# Altium PCB KATADC_V1-3.PcbDoc (part 4 of 7)
Units mm, origin at the board's own origin, x right, y up, seen from the top; angles counter-clockwise.
Board outline 127 x 85.85 mm, 6 copper layers (Top Layer, InnerPlane1, InnerPlane2, InnerPlane3, InnerPlane4, Bottom Layer), stack 1.255 mm thick; 189 components, 188 nets, 905 pads, 1090 vias.
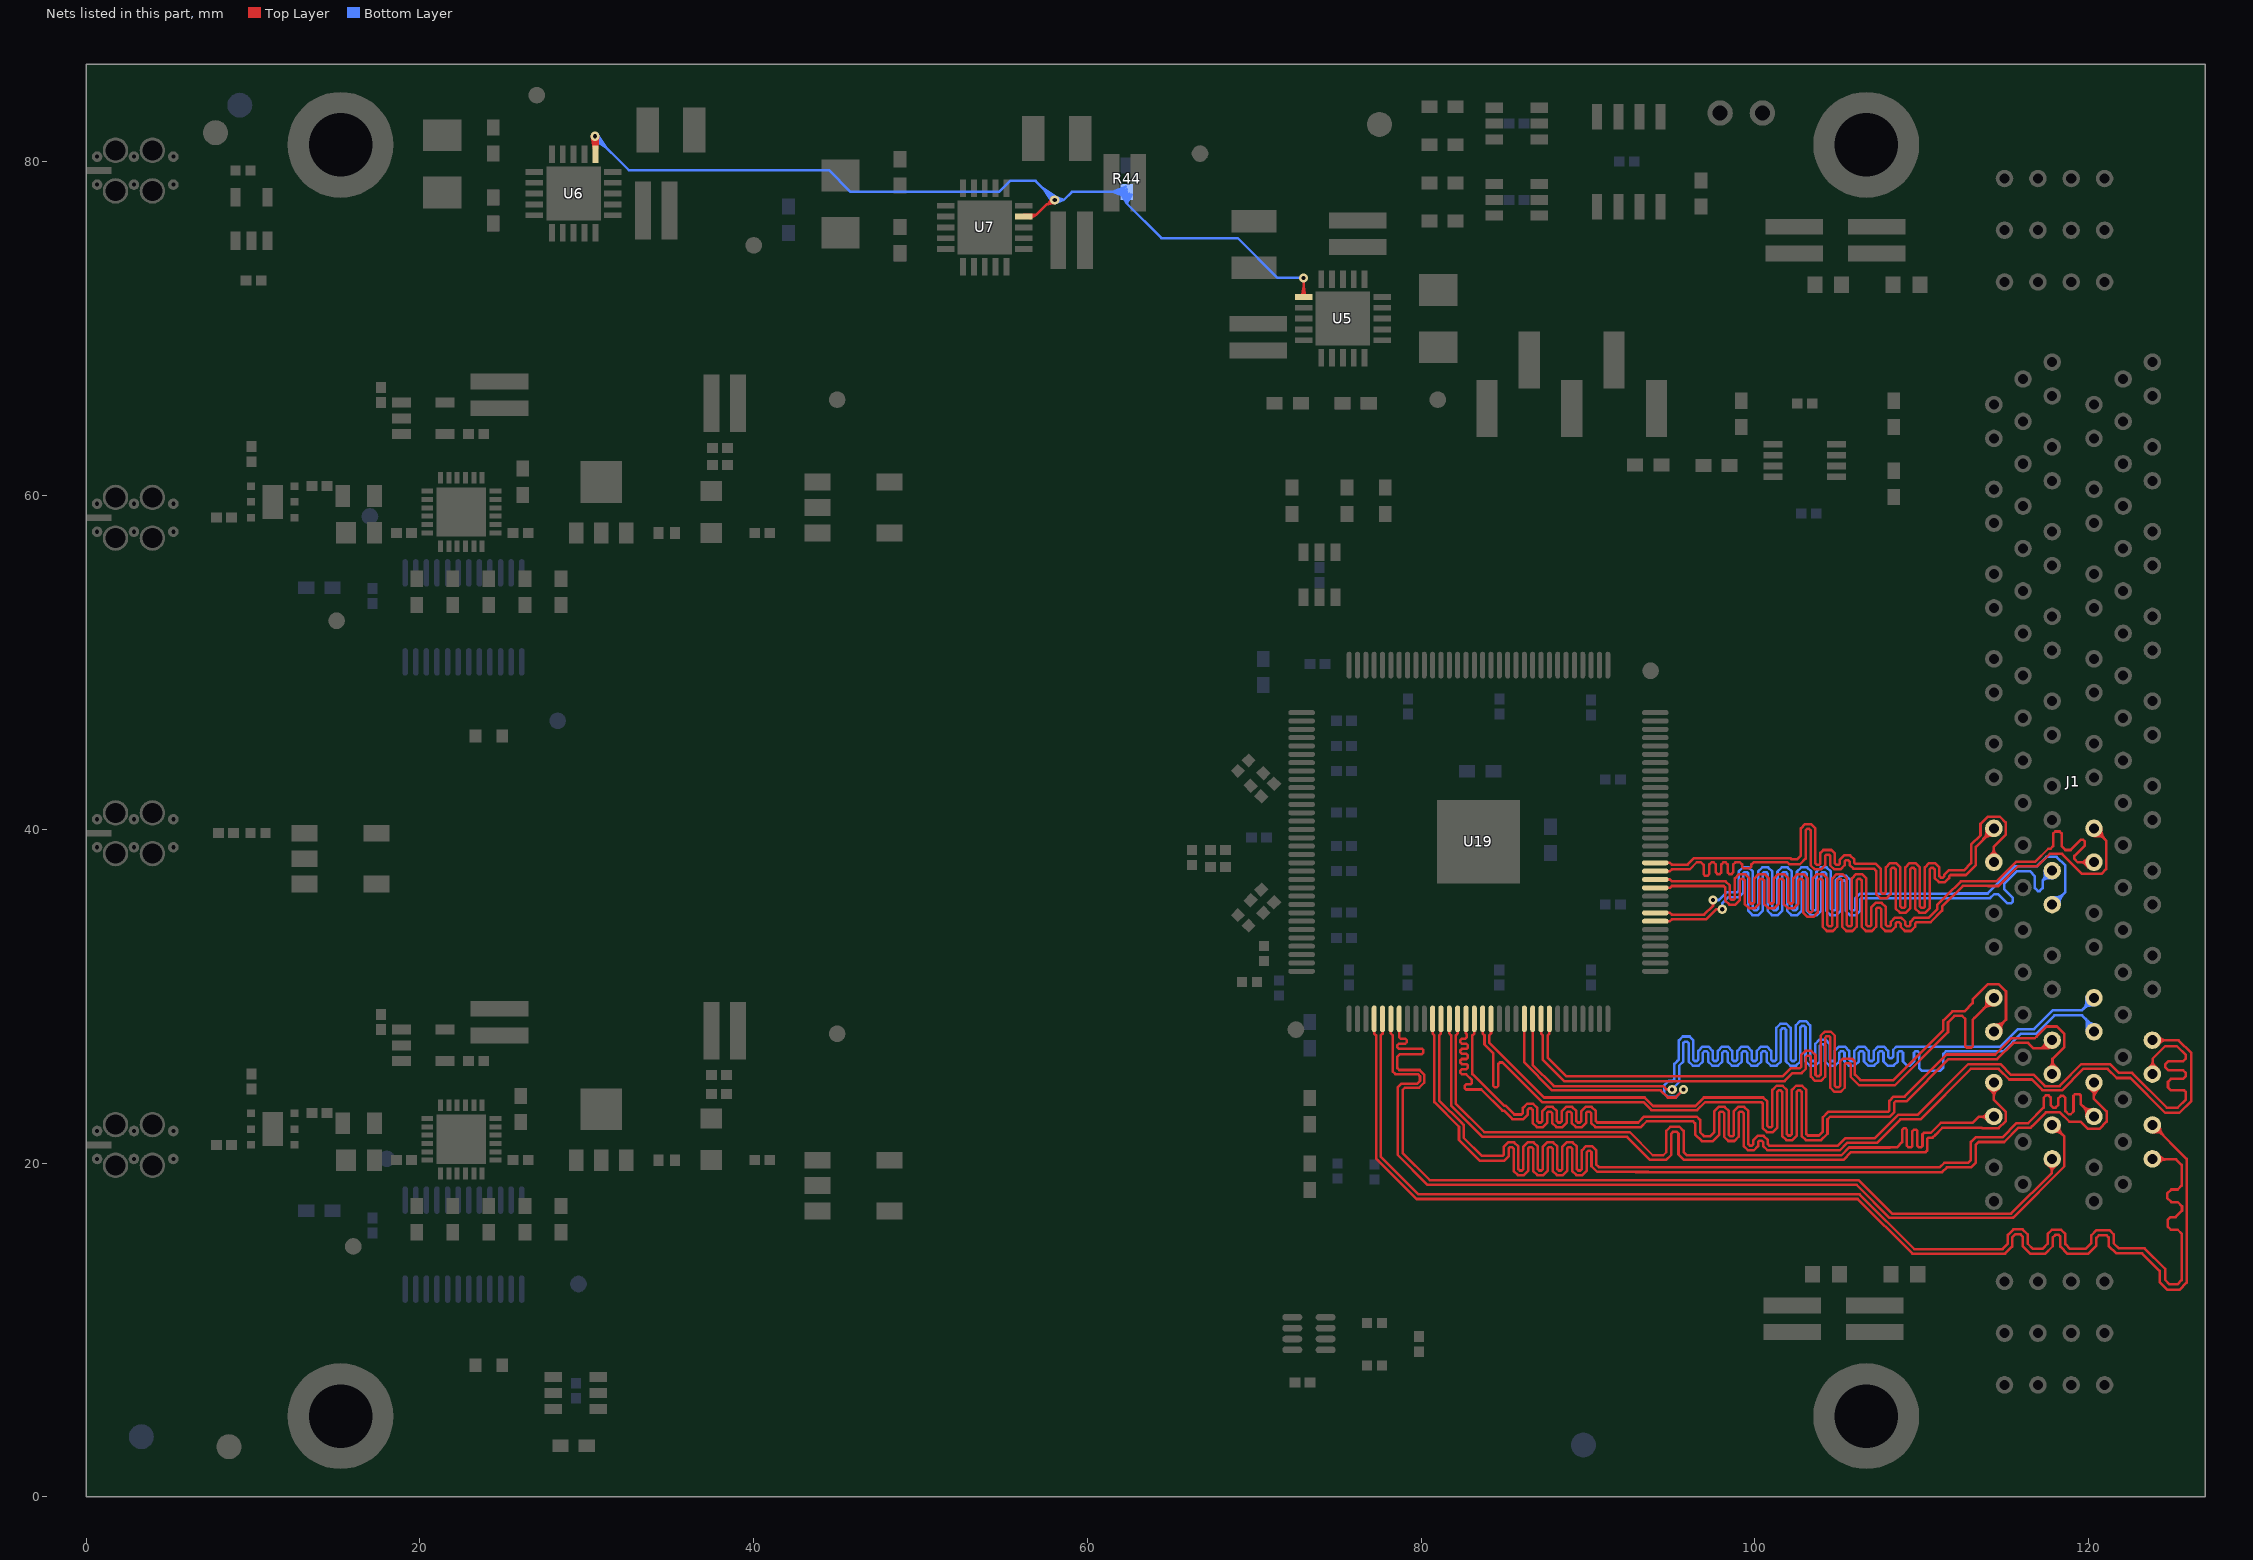
[diagram p8: the nets of this part, all layers, seen from the top]

## Via types
v1: diameter 0.55, hole 0.25, Top Layer to Bottom Layer, tented both sides, 1066 vias
v2: diameter 3.302, hole 2.2, Top Layer to Bottom Layer, tented both sides, 18 vias
v3: diameter 0.65, hole 0.25, Top Layer to Bottom Layer, tented both sides, 4 vias
v4: diameter 0.51, hole 0.25, Top Layer to Bottom Layer, tented both sides, 1 vias
v5: diameter 0.55, hole 0.25, Top Layer to Bottom Layer, 1 vias

## Nets (pads, with @x,y where several pads share a name; then routed paths per layer and width w, separated by ;. In a path a pad name is that pad's centre, name@x,y a point inside that pad or via, vN(x,y) a via of type N, cw(c..) or ccw(c..) an arc to the next point about the centre after c; other vN are vias at no path point) (continued)
DQ5+: J1.D13 U19.71 | length 58
  Top Layer w0.152: U19.71@94.039,34.493 94.915,34.493 ; U19.71@94.689,34.493 94.915,34.493 ; v1(98.044,35.214) 97.692,35.214 97.082,34.603 95.026,34.603 94.915,34.493
  Bottom Layer w0.152: v1(98.044,35.214) 98.044,35.566 98.42,35.942 99.051,35.942 99.304,36.195 99.304,37.35 99.393,37.439 99.519,37.439 99.609,37.35 99.609,35.115 99.862,34.862 100.219,34.862 100.472,35.115 100.472,37.35 100.561,37.439 100.688,37.439 100.777,37.35 100.777,35.115 101.03,34.862 101.388,34.862 101.641,35.115 101.641,37.35 101.73,37.439 101.856,37.439 101.945,37.35 101.945,35.115 102.198,34.862 102.556,34.862 102.809,35.115 102.809,37.35 102.898,37.439 103.025,37.439 103.114,37.35 103.114,35.115 103.367,34.862 103.724,34.862 103.977,35.115 103.977,37.35 104.067,37.439 104.193,37.439 104.282,37.35 104.282,35.115 104.535,34.862 104.893,34.862 105.146,35.115 105.146,36.844 105.235,36.934 105.361,36.934 105.451,36.844 105.451,35.115 105.704,34.862 106.061,34.862 106.314,35.115 106.314,35.783 106.403,35.872 109.213,35.872 ; 109.042,35.873 112.158,35.873 ; 111.907,35.873 114.105,35.873 114.351,36.119 114.579,36.119 115.138,35.56 115.367,35.56 115.468,35.662 115.468,35.89 114.96,36.398 114.96,36.703 ; 114.948,36.716 115.722,37.49 116.484,37.49 116.789,37.186 116.789,36.474 116.967,36.297 117.069,36.297 117.246,36.474 117.246,36.932 ; J1.D13@117.375,37.55 117.375,37.52 117.375,37.242 cw(c116.936,37.242) 117.246,36.932 ; J1.D13@117.83,37.515 117.246,36.932 ; J1.D13@117.875,37.075 117.825,37.075 117.593,37.075 ccw(c117.593,36.585) 117.247,36.932
DQ5-: J1.D14 U19.72 | length 58.1
  Top Layer w0.152: U19.72@94.039,34.993 94.915,34.993 ; U19.72@94.689,34.993 94.915,34.993 ; v1(97.494,35.763) 97.494,35.411 96.966,34.883 95.026,34.883 94.915,34.993
  Bottom Layer w0.152: v1(97.494,35.763) 97.846,35.763 98.304,36.221 98.935,36.221 99.024,36.31 99.024,37.466 99.277,37.718 99.635,37.718 99.888,37.466 99.888,35.231 99.977,35.142 100.104,35.142 100.193,35.231 100.193,37.466 100.446,37.718 100.803,37.718 101.056,37.466 101.056,35.231 101.146,35.142 101.272,35.142 101.361,35.231 101.361,37.466 101.614,37.718 101.972,37.718 102.225,37.466 102.225,35.231 102.314,35.142 102.44,35.142 102.53,35.231 102.53,37.466 102.783,37.718 103.14,37.718 103.393,37.466 103.393,35.231 103.482,35.142 103.609,35.142 103.698,35.231 103.698,37.466 103.951,37.718 104.309,37.718 104.562,37.466 104.562,35.231 104.651,35.142 104.777,35.142 104.866,35.231 104.866,36.96 105.119,37.213 105.477,37.213 105.73,36.96 105.73,35.231 105.819,35.142 105.946,35.142 106.035,35.231 106.035,35.88 106.307,36.152 111.971,36.152 ; 111.972,36.153 113.953,36.153 115.595,37.795 116.916,37.795 117.475,38.354 118.085,38.354 118.618,37.821 118.618,36.246 118.49,36.118 J1.D14@117.856,35.484 ; J1.D14@117.775,35.925 117.825,35.925 118.025,35.925 ccw(c118.025,36.583) 118.489,36.117 ccw(c119.009,35.599) 118.275,35.599 118.275,35.49 J1.D14@118.275,35.475
DQ6+: J1.C11 U19.75 | length 67.6
  Top Layer w0.152: U19.75@94.039,36.493 94.915,36.493 ; U19.75@94.689,36.493 94.915,36.493 ; J1.C11@120.345,40.03 121.053,39.322 121.053,37.871 ; J1.C11@120.35,39.6 120.612,39.6 cw(c120.612,39.171) 120.843,39.532 cw(c120.612,39.171) 120.916,39.474 ; J1.C11@120.775,40.05 120.775,39.902 ccw(c121.468,39.902) 120.978,39.412 ; 121.053,37.614 120.768,37.329 119.618,37.329 118.415,38.532 117.677,38.532 116.934,37.789 115.789,37.789 114.603,36.603 114.004,36.603 114.002,36.606 112.464,36.606 111.227,35.368 111.227,35.128 110.531,34.432 109.692,34.432 109.602,34.343 109.602,34.161 109.349,33.908 108.992,33.908 108.739,34.161 108.739,34.344 108.649,34.433 108.523,34.433 108.434,34.344 108.434,34.161 108.181,33.908 107.823,33.908 107.57,34.161 107.57,35.221 107.481,35.31 107.355,35.31 107.266,35.221 107.266,34.161 107.013,33.908 106.655,33.908 106.402,34.161 106.402,36.946 106.313,37.035 106.186,37.035 106.097,36.946 106.097,34.161 105.844,33.908 105.486,33.908 105.234,34.161 105.234,36.946 105.144,37.035 105.018,37.035 104.929,36.946 104.929,34.161 104.676,33.908 104.318,33.908 104.065,34.161 104.065,36.946 103.976,37.035 103.85,37.035 103.76,36.946 103.76,35.003 103.507,34.751 103.15,34.751 102.897,35.003 102.897,36.946 102.807,37.035 102.681,37.035 102.592,36.946 102.592,35.528 102.339,35.275 101.981,35.275 101.728,35.528 101.728,36.946 101.639,37.035 101.513,37.035 101.424,36.946 101.424,35.528 101.171,35.275 100.813,35.275 100.56,35.528 100.56,36.946 100.471,37.035 100.344,37.035 100.255,36.946 100.255,35.528 100.002,35.275 99.644,35.275 99.392,35.528 99.392,36.946 99.302,37.035 99.176,37.035 99.087,36.946 99.087,35.743 98.834,35.49 98.476,35.49 98.223,35.743 98.223,36.514 98.134,36.603 95.026,36.603 94.915,36.493 ; 121.053,37.788 121.053,37.871 ; 121.056,37.617 121.053,37.62 121.053,37.871
DQ6-: J1.C12 U19.76 | length 67.6
  Top Layer w0.152: U19.76@94.039,36.993 94.915,36.993 ; U19.76@94.689,36.993 94.915,36.993 ; 119.406,38.019 119.577,38.019 ; J1.C12@120,37.725 119.797,37.928 ccw(c119.577,37.709) 119.577,38.019 ; J1.C12@120,38.325 119.777,38.102 cw(c119.577,38.303) 119.627,38.024 cw(c119.577,38.303) 119.577,38.019 ; J1.C12@120.345,38.024 120.325,38.024 119.355,38.024 119.151,38.227 119.151,38.405 119.786,39.04 119.786,39.268 119.685,39.37 119.532,39.37 118.923,38.76 118.618,38.76 118.389,38.989 118.389,39.751 118.272,39.869 118.008,39.869 117.881,39.742 117.881,38.989 117.729,38.837 117.586,38.837 116.819,38.069 115.674,38.069 114.488,36.883 114.129,36.883 114.127,36.885 112.349,36.885 111.486,36.022 110.947,35.483 110.947,35.23 110.429,34.712 109.576,34.712 109.323,34.459 109.323,34.276 109.234,34.187 109.107,34.187 109.018,34.276 109.018,34.46 108.765,34.713 108.407,34.713 108.155,34.46 108.155,34.276 108.065,34.187 107.939,34.187 107.85,34.276 107.85,35.336 107.597,35.589 107.239,35.589 106.986,35.336 106.986,34.276 106.897,34.187 106.771,34.187 106.681,34.276 106.681,37.061 106.428,37.314 106.071,37.314 105.818,37.061 105.818,34.276 105.728,34.187 105.602,34.187 105.513,34.276 105.513,37.061 105.26,37.314 104.902,37.314 104.649,37.061 104.649,34.276 104.56,34.187 104.434,34.187 104.345,34.276 104.345,37.061 104.092,37.314 103.734,37.314 103.481,37.061 103.481,35.119 103.392,35.03 103.265,35.03 103.176,35.119 103.176,37.061 102.923,37.314 102.565,37.314 102.313,37.061 102.313,35.644 102.223,35.555 102.097,35.555 102.008,35.644 102.008,37.061 101.755,37.314 101.397,37.314 101.144,37.061 101.144,35.644 101.055,35.555 100.929,35.555 100.839,35.644 100.839,37.061 100.586,37.314 100.229,37.314 99.976,37.061 99.976,35.644 99.886,35.555 99.76,35.555 99.671,35.644 99.671,37.061 99.418,37.314 99.06,37.314 98.807,37.061 98.807,35.858 98.718,35.769 98.592,35.769 98.503,35.858 98.503,36.63 98.25,36.883 95.026,36.883 94.915,36.993
DQ7+: J1.F11 U19.77 | length 48.2
  Top Layer w0.152: U19.77@94.039,37.493 94.915,37.493 ; U19.77@94.689,37.493 94.915,37.493 ; 98.831,38.024 98.704,37.897 98.704,37.414 98.603,37.313 98.476,37.313 98.374,37.414 98.374,37.897 98.246,38.025 98.122,38.025 97.993,37.897 97.993,37.414 97.892,37.313 97.765,37.313 97.663,37.414 97.663,37.897 97.534,38.025 97.411,38.025 97.282,37.897 97.282,37.338 97.155,37.211 97.028,37.211 96.926,37.313 96.926,37.871 96.772,38.025 96.522,38.025 96.1,37.603 95.026,37.603 94.915,37.493 ; 98.831,38.025 99.109,38.025 99.238,37.897 99.238,37.744 99.314,37.668 99.695,37.668 99.797,37.77 99.797,37.897 99.924,38.024 ; 99.924,38.025 101.192,38.025 ; 101.194,38.024 101.192,38.025 ; 104.419,38.481 104.394,38.481 ; 113.687,39.422 cw(c114.177,38.932) 113.823,39.528 cw(c114.177,38.932) 114.177,39.625 J1.F11@114.325,39.625 ; 113.749,39.484 ccw(c113.446,39.788) 113.875,39.788 J1.F11@113.875,40.05 ; J1.F11@114.325,40.03 113.247,38.952 113.247,37.855 112.655,37.263 111.732,37.263 111.643,37.173 111.643,37.084 111.39,36.831 111.032,36.831 110.779,37.084 110.779,37.605 110.69,37.695 110.564,37.695 110.475,37.605 110.475,35.262 110.222,35.009 109.864,35.009 109.611,35.262 109.611,37.605 109.522,37.694 109.396,37.694 109.306,37.605 109.306,35.262 109.053,35.009 108.696,35.009 108.443,35.262 108.443,37.605 108.353,37.694 108.227,37.694 108.138,37.605 108.138,36.116 107.885,35.863 107.719,35.863 107.712,35.869 107.521,35.869 107.274,36.116 107.274,37.514 107.138,37.65 105.908,37.65 105.688,37.87 105.688,38.067 105.598,38.157 105.472,38.157 105.383,38.067 105.383,37.847 105.13,37.594 104.772,37.594 104.519,37.847 104.519,38.407 104.445,38.481 104.394,38.481 ; 101.192,38.025 101.954,38.025 102.083,37.897 102.692,37.897 103.046,38.251 103.046,39.942 103.135,40.032 103.261,40.032 103.351,39.942 103.351,37.847 103.604,37.594 103.961,37.594 104.214,37.847 104.214,38.403 104.292,38.481 104.394,38.481
DQ7-: J1.F12 U19.78 | length 48.2
  Top Layer w0.152: U19.78@94.039,37.993 94.915,37.993 ; U19.78@94.689,37.993 94.915,37.993 ; 104.724,38.633 104.648,38.71 ; J1.F12@114.025,38.35 114.228,38.553 ccw(c114.009,38.773) 114.319,38.773 ; 114.319,38.944 114.319,38.773 ; J1.F12@114.325,38.1 114.325,38.964 115.026,39.664 115.026,40.422 114.681,40.767 113.97,40.767 113.525,40.322 113.525,39.636 112.968,39.079 112.968,37.971 112.539,37.542 111.617,37.542 111.364,37.289 111.364,37.2 111.274,37.11 111.148,37.11 111.059,37.2 111.059,37.721 110.806,37.974 110.448,37.974 110.195,37.721 110.195,35.378 110.106,35.289 109.98,35.289 109.89,35.378 109.89,37.72 109.638,37.973 109.28,37.973 109.027,37.72 109.027,35.378 108.938,35.289 108.811,35.289 108.722,35.378 108.722,37.721 108.469,37.974 108.111,37.974 107.858,37.721 107.858,36.231 107.775,36.148 107.637,36.148 107.554,36.231 107.554,37.63 107.254,37.93 106.023,37.93 105.967,37.986 105.967,38.183 105.714,38.436 105.356,38.436 105.103,38.183 105.103,37.963 105.014,37.874 104.888,37.874 104.799,37.963 104.799,38.559 104.648,38.71 ; J1.F12@114.625,38.35 114.402,38.573 cw(c114.603,38.773) 114.325,38.715 cw(c114.603,38.773) 114.319,38.773 ; 94.915,37.993 95.026,37.883 95.969,37.883 96.364,38.278 102.133,38.278 102.21,38.202 102.54,38.202 102.767,38.428 102.767,40.058 103.019,40.311 103.377,40.311 103.63,40.058 103.63,37.963 103.719,37.874 103.846,37.874 103.935,37.963 103.935,38.581 104.115,38.76 104.597,38.76 104.648,38.71
DQD0+: J1.A19 U19.36 | length 77.4
  Top Layer w0.152: U19.36@77.189,27.993 77.189,27.762 ; U19.36@77.189,28.643 77.189,27.762 ; J1.A19@123.85,21.85 124.112,21.85 cw(c124.112,21.421) 124.345,21.781 cw(c124.112,21.421) 124.416,21.724 ; J1.A19@123.85,22.276 125.882,20.244 125.882,12.827 125.451,12.395 124.739,12.395 124.257,12.878 124.257,13.538 123.215,14.58 121.666,14.58 121.209,15.037 121.209,15.545 121.082,15.672 120.625,15.672 120.472,15.519 120.472,15.062 119.964,14.554 118.745,14.554 118.313,14.986 118.313,15.596 118.212,15.697 118.008,15.697 117.856,15.545 117.856,15.011 117.399,14.554 116.535,14.554 116.053,15.037 116.053,15.596 115.926,15.723 115.595,15.723 115.418,15.545 115.418,14.986 114.999,14.567 109.442,14.567 106.165,17.844 79.724,17.844 77.299,20.268 77.299,27.652 77.189,27.762 ; J1.A19@124.275,22.3 124.275,22.28 124.275,22.152 ccw(c124.968,22.152) 124.478,21.662
DQD0-: J1.A20 U19.37 | length 77.4
  Top Layer w0.152: U19.37@77.689,27.993 77.689,27.762 ; U19.37@77.689,28.643 77.689,27.762 ; J1.A20@123.825,20.218 124.656,20.218 ; J1.A20@124.1,19.9 124.137,19.937 124.25,20.05 cw(c124.656,19.645) 124.656,20.218 ; J1.A20@124.15,20.55 124.358,20.342 ccw(c124.656,20.64) 124.656,20.218 ; 77.689,27.762 77.579,27.652 77.579,20.383 79.839,18.123 106.281,18.123 109.557,14.846 114.846,14.846 115.165,15.165 115.165,15.699 115.494,16.027 116.053,16.027 116.357,15.723 116.357,15.164 116.662,14.859 117.246,14.859 117.551,15.164 117.551,15.748 117.805,16.002 118.364,16.002 118.618,15.748 118.618,15.138 118.897,14.859 119.812,14.859 120.167,15.215 120.167,15.672 120.472,15.977 121.26,15.977 121.514,15.723 121.514,15.189 121.818,14.884 123.368,14.884 124.587,13.665 124.587,13.005 124.866,12.725 125.324,12.725 125.578,12.979 125.578,15.773 125.349,16.002 124.943,16.002 124.739,16.205 124.739,16.586 124.917,16.764 125.222,16.764 125.603,17.145 125.603,17.399 125.349,17.653 124.968,17.653 124.714,17.907 124.714,18.161 124.968,18.415 125.349,18.415 125.578,18.644 125.578,19.888 125.247,20.218 124.656,20.218
DQD1+: J1.D19 U19.38 | length 57.9
  Top Layer w0.152: U19.38@78.189,27.993 78.189,27.767 ; U19.38@78.189,28.643 78.189,27.767 ; J1.D19@117.805,22.25 117.825,22.25 117.9,22.25 118.553,21.597 118.553,19.807 115.494,16.747 115.461,16.715 108.084,16.715 106.108,18.691 80.395,18.691 78.588,20.498 78.588,24.536 78.816,24.765 79.781,24.765 79.934,24.917 79.934,25.197 79.807,25.324 78.461,25.324 78.299,25.485 78.299,27.656 78.189,27.767 ; J1.D19@117.825,21.875 118.087,21.875 cw(c118.087,21.446) 118.391,21.749 ; J1.D19@118.25,22.325 118.25,22.28 118.25,22.177 ccw(c118.943,22.177) 118.387,21.763 ccw(c118.943,22.177) 118.453,21.687
DQD1-: J1.D20 U19.39 | length 57.7
  Top Layer w0.152: U19.39@78.689,27.993 78.689,27.767 ; U19.39@78.689,28.643 78.689,27.767 ; J1.D20@117.45,20 117.512,19.938 117.73,19.72 cw(c117.561,19.551) 117.8,19.551 ; J1.D20@117.805,20.218 117.8,20.213 117.8,19.551 ; J1.D20@118.15,19.95 118.137,19.937 117.835,19.635 ccw(c117.919,19.551) 117.8,19.551 ; 78.689,27.767 78.689,27.534 78.768,27.454 79.05,27.454 79.139,27.365 79.139,27.239 79.05,27.15 78.668,27.15 78.579,27.06 78.579,26.934 78.668,26.845 80.064,26.845 80.137,26.772 80.137,26.619 80.035,26.518 78.715,26.518 78.579,26.382 78.579,25.688 78.691,25.576 79.911,25.576 80.186,25.301 80.186,24.813 79.886,24.513 79.021,24.513 78.892,24.384 78.892,20.596 80.518,18.97 106.224,18.97 108.227,16.967 115.357,16.967 117.8,19.411 117.8,19.551
DQD2+: J1.C17 U19.43 | length 67.7
  Top Layer w0.152: U19.43@80.689,27.993 80.689,27.767 ; U19.43@80.689,28.643 80.689,27.767 ; 92.874,19.462 93.022,19.462 ; 116.688,22.276 116.611,22.2 ; 119.99,22.047 120.015,22.047 ; J1.C17@120.025,24.5 120.248,24.277 cw(c120.047,24.077) 120.32,24.155 ; J1.C17@120.32,24.816 120.32,24.155 ; 120.422,24.297 J1.C17@120.625,24.5 ; J1.C17@120.65,24.525 120.575,24.425 120.32,24.051 ; 80.689,27.767 80.799,27.656 80.799,23.645 82.271,22.174 82.271,21.387 83.512,20.145 84.992,20.145 85.245,20.398 85.245,20.864 85.334,20.953 85.46,20.953 85.549,20.864 85.549,19.527 85.802,19.274 86.16,19.274 86.413,19.527 86.413,20.864 86.502,20.953 86.629,20.953 86.718,20.864 86.718,19.527 86.971,19.274 87.329,19.274 87.581,19.527 87.581,20.864 87.671,20.953 87.797,20.953 87.886,20.864 87.886,19.527 88.139,19.274 88.497,19.274 88.75,19.527 88.75,20.864 88.839,20.953 88.965,20.953 89.055,20.864 89.055,19.527 89.308,19.274 89.665,19.274 89.918,19.527 89.918,20.644 90.008,20.733 90.134,20.733 90.212,20.654 90.212,19.808 90.556,19.464 93.02,19.464 93.022,19.462 ; 93.022,19.462 93.613,19.462 93.614,19.461 111.231,19.461 111.506,19.736 112.954,19.736 113.233,20.015 113.233,21.082 113.411,21.26 114.949,21.26 115.808,22.119 116.53,22.119 116.611,22.2 ; 116.611,22.2 117.45,23.038 118.288,23.038 118.847,22.479 119.532,22.479 119.964,22.047 120.015,22.047 ; 120.015,22.047 120.65,22.047 121.082,22.479 121.082,23.089 120.32,23.851 120.32,24.051 ; 120.32,24.051 120.32,24.155
DQD2-: J1.C18 U19.44 | length 67.6
  Top Layer w0.152: U19.44@81.189,27.993 81.189,27.767 ; U19.44@81.189,28.643 81.189,27.767 ; 113.233,21.539 112.954,21.26 112.954,20.193 112.776,20.015 111.354,20.015 111.078,19.74 93.763,19.74 93.759,19.744 91.201,19.744 91.188,19.757 90.658,19.757 90.492,19.924 90.492,20.77 90.25,21.012 89.892,21.012 89.639,20.759 89.639,19.643 89.55,19.553 89.423,19.553 89.334,19.643 89.334,20.98 89.081,21.232 88.723,21.232 88.47,20.98 88.47,19.643 88.381,19.553 88.255,19.553 88.166,19.643 88.166,20.98 87.913,21.232 87.555,21.232 87.302,20.98 87.302,19.643 87.213,19.553 87.087,19.553 86.997,19.643 86.997,20.98 86.744,21.232 86.387,21.232 86.134,20.98 86.134,19.643 86.044,19.553 85.918,19.553 85.829,19.643 85.829,20.98 85.576,21.232 85.218,21.232 84.965,20.98 84.965,20.514 84.876,20.425 83.639,20.425 82.55,21.514 82.55,22.29 82.442,22.398 81.079,23.761 81.079,27.656 81.189,27.767 ; 113.259,21.539 114.833,21.539 115.692,22.398 116.388,22.398 117.307,23.317 117.307,23.911 117.45,24.054 117.602,24.054 117.729,23.927 117.729,23.47 117.881,23.317 118.034,23.317 118.186,23.47 118.186,23.876 118.339,24.028 118.491,24.028 118.618,23.901 118.618,23.114 118.808,22.924 118.935,22.924 119.101,23.089 119.101,24.028 119.202,24.13 119.456,24.13 119.532,24.054 119.532,23.546 J1.C18@120.269,22.809 ; 119.672,23.413 cw(c119.182,22.923) 119.727,23.351 cw(c119.182,22.923) 119.875,22.923 119.875,22.79 J1.C18@119.875,22.775 ; 119.734,23.351 ccw(c120.038,23.654) 120.038,23.225 J1.C18@120.3,23.225 ; J1.C18@120.218,22.809 J1.C18@120.269,22.809 ; J1.C18@120.294,22.809 J1.C18@120.269,22.809 ; J1.C18@120.32,22.758 120.307,22.772 J1.C18@120.294,22.784 ; J1.C18@120.332,22.797 J1.C18@120.345,22.784 ; J1.C18@120.396,22.784 J1.C18@120.345,22.784 ; J1.C18@120.269,22.809 J1.C18@120.294,22.784 ; J1.C18@120.294,22.784 120.325,22.784 J1.C18@120.345,22.784
DQD3+: J1.F17 U19.45 | length 48.2
  Top Layer w0.152: U19.45@81.689,27.993 81.689,27.767 ; U19.45@81.689,28.643 81.689,27.767 ; 110.82,21.692 111.235,22.107 113.614,22.107 113.632,22.089 114.615,22.089 115.026,22.5 115.026,23.08 114.325,23.781 J1.F17@114.325,24.82 J1.F17@114.325,24.841 ; 110.824,21.688 110.662,21.527 110.42,21.527 110.33,21.437 110.33,20.752 110.23,20.652 105.77,20.652 105.305,20.188 95.763,20.188 95.428,20.523 95.428,21.768 95.326,21.869 95.098,21.869 94.996,21.768 94.996,20.498 94.686,20.188 93.731,20.188 92.352,21.567 83.668,21.567 81.799,23.436 81.799,27.656 81.689,27.767 ; J1.F17@114.025,24.475 114.248,24.252 cw(c114.047,24.052) 114.325,24.106 cw(c114.047,24.052) 114.331,24.052 ; 114.331,23.881 114.331,24.052 ; J1.F17@114.625,24.475 114.422,24.272 ccw(c114.641,24.052) 114.331,24.052
DQD3-: J1.F18 U19.46 | length 48.2
  Top Layer w0.152: U19.46@82.189,27.993 82.189,27.767 ; U19.46@82.189,28.643 82.189,27.767 ; 95.91,20.467 105.19,20.467 105.654,20.932 108.077,20.932 ; 95.91,20.472 95.733,20.65 95.733,21.92 95.479,22.174 94.945,22.174 94.691,21.92 94.691,20.645 94.513,20.467 93.883,20.467 92.504,21.847 83.783,21.847 82.079,23.551 82.079,27.656 82.189,27.767 ; 108.09,20.943 108.522,20.943 108.832,21.253 108.832,21.989 108.915,22.073 109.042,22.073 109.118,21.996 109.118,21.031 109.195,20.955 ; 109.226,20.943 109.352,20.943 109.441,21.032 109.441,21.913 109.525,21.996 109.677,21.996 109.746,21.927 109.746,21.032 109.836,20.943 109.962,20.943 110.051,21.032 110.051,21.717 110.14,21.806 110.546,21.806 111.143,22.403 113.055,22.403 113.436,22.784 114.275,22.784 J1.F18@114.3,22.809 ; 113.431,22.769 113.602,22.769 ; J1.F18@114.025,22.475 113.822,22.678 ccw(c113.602,22.459) 113.602,22.769 ; J1.F18@114.025,23.075 113.802,22.852 cw(c113.602,23.053) 113.691,22.784 cw(c113.602,23.053) 113.602,22.769
DQD4+: J1.A17 U19.47 | length 77.3
  Top Layer w0.152: U19.47@82.689,27.993 82.689,27.767 ; U19.47@82.689,28.643 82.689,27.767 ; J1.A17@123.825,27.356 125.4,27.356 126.162,26.594 126.162,23.724 125.451,23.012 124.587,23.012 122.504,25.095 121.691,25.095 121.143,25.643 119.681,25.643 118.398,24.36 117.249,24.36 117.242,24.367 116.604,25.005 115.25,25.005 114.612,25.643 112.943,25.643 109.919,22.619 108.724,22.619 107.316,21.211 105.538,21.211 105.094,20.767 100.751,20.767 100.498,21.02 100.498,21.254 100.409,21.343 100.283,21.343 100.194,21.254 100.194,21.02 99.941,20.767 99.583,20.767 99.33,21.02 99.33,22.992 99.241,23.081 99.114,23.081 99.025,22.992 99.025,21.574 98.772,21.321 98.414,21.321 98.162,21.574 98.162,22.992 98.072,23.081 97.946,23.081 97.857,22.992 97.857,21.682 97.485,21.311 96.825,21.311 96.418,21.717 96.418,22.381 96.295,22.504 93.523,22.504 93.168,22.149 90.446,22.149 90.193,22.402 90.193,22.992 90.104,23.081 89.977,23.081 89.888,22.992 89.888,22.402 89.635,22.149 89.278,22.149 89.025,22.402 89.025,22.992 88.935,23.081 88.809,23.081 88.72,22.992 88.72,22.402 88.467,22.149 88.109,22.149 87.856,22.402 87.856,22.992 87.767,23.081 87.641,23.081 87.551,22.992 87.551,22.402 87.298,22.149 86.941,22.149 86.688,22.402 86.688,23.184 86.599,23.273 86.472,23.273 86.383,23.184 86.383,22.883 86.13,22.63 85.472,22.63 84.96,23.142 84.87,23.142 83.606,24.406 82.695,24.406 82.605,24.496 82.605,24.622 82.695,24.711 82.959,24.711 83.048,24.801 83.048,24.964 82.691,25.321 82.447,25.321 82.358,25.41 82.358,25.536 82.447,25.626 82.71,25.626 82.799,25.715 82.799,25.841 82.71,25.93 82.447,25.93 82.358,26.02 82.358,26.146 82.447,26.235 82.71,26.235 82.799,26.325 82.799,26.451 82.71,26.54 82.447,26.54 82.358,26.629 82.358,26.756 82.447,26.845 82.71,26.845 82.799,26.934 82.799,27.06 82.71,27.15 82.447,27.15 82.358,27.239 82.358,27.365 82.447,27.454 82.66,27.454 82.749,27.544 82.749,27.707 82.689,27.767 ; J1.A17@124.15,27.05 124.373,27.273 cw(c124.573,27.072) 124.573,27.356 ; J1.A17@124.15,27.65 124.353,27.447 ccw(c124.573,27.666) 124.562,27.356 ccw(c124.573,27.666) 124.573,27.356 ; 124.744,27.356 124.573,27.356
DQD4-: J1.A18 U19.48 | length 77.3
  Top Layer w0.152: U19.48@83.189,27.993 83.189,27.767 ; U19.48@83.189,28.643 83.189,27.767 ; 90.678,22.428 93.015,22.428 93.37,22.784 96.52,22.784 96.723,22.581 96.723,21.844 96.952,21.615 97.333,21.615 97.577,21.86 97.577,23.107 97.83,23.36 98.188,23.36 98.441,23.107 98.441,21.69 98.53,21.601 98.656,21.601 98.746,21.69 98.746,23.107 98.999,23.36 99.356,23.36 99.609,23.107 99.609,21.136 99.699,21.046 99.825,21.046 99.914,21.136 99.914,21.37 100.167,21.623 100.525,21.623 100.778,21.37 100.778,21.136 100.867,21.046 104.978,21.046 105.423,21.491 107.2,21.491 108.595,22.885 109.017,22.885 ; 90.688,22.429 90.562,22.429 90.472,22.518 90.472,23.107 90.219,23.36 89.862,23.36 89.609,23.107 89.609,22.518 89.52,22.429 89.393,22.429 89.304,22.518 89.304,23.107 89.051,23.36 88.693,23.36 88.44,23.107 88.44,22.518 88.351,22.429 88.225,22.429 88.136,22.518 88.136,23.107 87.883,23.36 87.525,23.36 87.272,23.107 87.272,22.518 87.183,22.429 87.056,22.429 86.967,22.518 86.967,23.3 86.714,23.553 86.357,23.553 86.104,23.3 86.104,22.999 86.014,22.909 85.588,22.909 85.075,23.422 84.986,23.422 83.079,25.329 83.079,27.656 83.189,27.767 ; 108.991,22.885 109.017,22.885 ; 118.386,24.743 119.565,25.923 120.929,25.923 ; 118.389,24.74 118.262,24.613 117.392,24.613 116.72,25.285 115.366,25.285 114.728,25.923 112.791,25.923 109.753,22.885 109.017,22.885 ; 121.03,25.923 120.929,25.923 ; J1.A18@123.55,25.65 123.753,25.853 ccw(c123.534,26.073) 123.844,26.073 ; J1.A18@123.825,25.324 J1.A18@123.828,25.327 ; 123.844,26.244 123.844,26.073 ; J1.A18@123.85,25.324 123.85,25.33 123.85,26.264 124.587,27 125.298,27 125.832,26.467 125.832,26.264 125.679,26.111 124.79,26.111 124.612,25.933 124.612,25.73 124.79,25.552 125.679,25.552 125.832,25.4 125.832,25.222 125.654,25.044 124.943,25.044 124.765,24.867 124.765,24.536 124.943,24.359 125.73,24.359 125.832,24.257 125.832,23.8 125.349,23.317 124.689,23.317 122.606,25.4 121.818,25.4 121.296,25.923 120.929,25.923 ; J1.A18@124.15,25.65 124.147,25.653 123.927,25.873 cw(c124.128,26.073) 123.85,26.015 cw(c124.128,26.073) 123.844,26.073
DQD5+: J1.D17 U19.49 | length 59.3
  Top Layer w0.152: U19.49@83.689,27.993 83.689,27.767 ; U19.49@83.689,28.643 83.689,27.767 ; 104.838,22.784 104.521,22.784 104.356,22.619 104.356,21.755 103.971,21.371 103.062,21.371 102.809,21.624 102.809,24.264 102.72,24.354 102.594,24.354 102.505,24.264 102.505,21.624 102.252,21.371 101.894,21.371 101.641,21.624 101.641,24.264 101.552,24.354 101.426,24.354 101.336,24.264 101.336,22.111 101.083,21.858 100.726,21.858 100.473,22.111 100.473,23.568 100.393,23.647 97.029,23.647 96.548,23.166 93.799,23.166 93.318,23.647 87.255,23.647 84.878,26.024 84.715,26.024 84.626,25.935 84.626,24.631 84.537,24.542 84.41,24.542 84.321,24.631 84.321,26.581 83.799,27.103 83.799,27.656 83.689,27.767 ; 104.851,22.784 104.854,22.787 108.094,22.787 108.347,23.04 108.347,23.612 108.436,23.701 109.093,23.701 111.618,26.225 114.525,26.225 115.499,27.199 116.373,27.199 116.698,26.873 117.131,26.873 ; 117.237,26.872 cw(c117.727,26.382) 117.238,26.873 ; 117.299,26.934 ccw(c116.996,27.238) 117.425,27.238 117.425,27.36 J1.D17@117.425,27.5 ; J1.D17@117.4,27.425 117.4,27.36 117.4,27.206 cw(c117.144,27.206) 117.325,27.025 117.203,26.903 cw(c117.131,26.976) 117.131,26.873 ; J1.D17@117.8,27.43 117.778,27.407 117.243,26.873 ; J1.D17@117.875,27.075 117.825,27.075 117.727,27.075 ccw(c117.727,26.382) 117.291,26.92 ccw(c117.727,26.382) 117.238,26.873 ; J1.D17@117.9,26.925 117.825,26.925 117.721,26.925 ccw(c117.721,26.754) 117.6,26.875 117.248,26.875 ccw(c117.248,26.869) 117.243,26.873 ; 117.131,26.873 117.238,26.873 ; 117.238,26.873 117.243,26.873
DQD5-: J1.D18 U19.50 | length 57.9
  Top Layer w0.152: U19.50@84.189,27.993 84.189,27.767 ; U19.50@84.189,28.643 84.189,27.767 ; 96.926,23.901 96.444,23.419 93.904,23.419 93.396,23.927 87.371,23.927 84.079,27.219 84.079,27.656 84.189,27.767 ; 96.926,23.927 100.45,23.927 100.46,23.937 100.499,23.937 100.752,23.684 100.752,22.227 100.841,22.138 100.968,22.138 101.057,22.227 101.057,24.38 101.31,24.633 101.667,24.633 101.92,24.38 101.92,21.739 102.01,21.65 102.136,21.65 102.225,21.739 102.225,24.38 102.478,24.633 102.836,24.633 103.089,24.38 103.089,21.739 103.178,21.65 103.844,21.65 104.076,21.882 104.076,22.746 104.397,23.066 107.978,23.066 108.067,23.155 108.067,23.727 108.32,23.98 108.977,23.98 111.502,26.505 114.41,26.505 115.383,27.478 116.779,27.478 116.889,27.584 117.488,28.183 118.112,28.183 118.553,27.742 118.553,26.961 117.831,26.238 117.831,25.375 117.85,25.355 J1.D18@117.856,25.349 ; J1.D18@117.55,25.65 117.753,25.853 ccw(c117.534,26.073) 117.831,25.981 ccw(c117.534,26.073) 117.844,26.073 ; 117.844,26.244 117.844,26.073 ; J1.D18@118.15,25.65 118.147,25.653 117.927,25.873 cw(c118.128,26.073) 117.844,26.073
DQD6+: J1.C15 U19.54 | length 67.5
  Top Layer w0.152: U19.54@86.189,28.643 86.189,26.027 87.856,24.36 94.359,24.36 94.793,23.927 95.25,23.927 v1(95.733,24.409)
  Bottom Layer w0.152: v1(95.733,24.409) 95.281,23.958 94.787,23.958 94.564,24.181 94.564,24.638 94.844,24.917 95.047,24.917 95.174,25.044 95.174,25.934 95.355,26.116 95.444,26.205 95.444,27.347 95.682,27.584 96.088,27.584 96.308,27.365 96.308,26.205 96.397,26.116 96.523,26.116 96.613,26.205 96.613,26.726 96.866,26.979 97.223,26.979 97.476,26.726 97.476,26.205 97.566,26.116 97.692,26.116 97.781,26.205 97.781,26.726 98.034,26.979 98.392,26.979 98.645,26.726 98.645,26.205 98.734,26.116 98.86,26.116 98.949,26.205 98.949,26.726 99.202,26.979 99.56,26.979 99.813,26.726 99.813,26.205 99.902,26.116 100.029,26.116 100.118,26.205 100.118,26.726 100.371,26.979 100.729,26.979 100.981,26.726 100.981,26.205 101.071,26.116 101.197,26.116 101.286,26.205 101.286,28.094 101.539,28.346 101.897,28.346 102.15,28.094 102.15,26.205 102.239,26.116 102.365,26.116 102.455,26.205 102.455,28.248 102.708,28.501 103.065,28.501 103.318,28.248 103.318,26.205 103.408,26.116 103.534,26.116 103.623,26.205 103.623,27.142 103.876,27.395 104.234,27.395 104.487,27.142 104.487,26.205 104.576,26.116 104.702,26.116 104.791,26.205 104.791,26.726 105.044,26.979 105.402,26.979 105.655,26.726 105.655,26.205 105.744,26.116 105.871,26.116 105.96,26.205 105.96,26.726 106.213,26.979 106.571,26.979 106.823,26.726 106.823,26.205 106.913,26.116 107.039,26.116 107.128,26.205 107.128,26.726 107.381,26.979 107.739,26.979 107.992,26.726 107.992,26.374 108.077,26.289 108.204,26.289 108.255,26.34 ; 108.28,26.365 108.255,26.34 ; J1.C15@119.875,29.95 119.875,29.9 119.875,29.668 cw(c119.289,29.668) 119.703,29.254 ; J1.C15@120.312,29.913 J1.C15@120.32,29.921 ; J1.C15@120.345,29.896 120.337,29.888 119.703,29.254 ; J1.C15@120.35,29.45 120.325,29.45 120.177,29.45 ccw(c120.177,28.781) 119.703,29.254 ; 108.255,26.34 108.297,26.382 108.297,26.788 108.488,26.979 114.736,26.979 115.781,28.024 116.733,28.024 117.868,29.159 119.609,29.159 119.703,29.254
DQD6-: J1.C16 U19.55 | length 68.8
  Top Layer w0.152: U19.55@86.689,28.643 86.689,25.884 87.96,24.613 91.796,24.613 ; 91.821,24.613 91.796,24.613 ; v1(95.047,24.409) 94.717,24.409 94.513,24.613 91.796,24.613
  Bottom Layer w0.152: v1@95.021,24.409 95.034,24.422 95.471,24.859 95.471,25.836 95.724,26.089 95.724,27.194 95.809,27.28 95.936,27.28 96.028,27.187 96.028,26.089 96.281,25.836 96.639,25.836 96.892,26.089 96.892,26.611 96.981,26.7 97.108,26.7 97.197,26.611 97.197,26.089 97.45,25.836 97.808,25.836 98.06,26.089 98.06,26.611 98.15,26.7 98.276,26.7 98.365,26.611 98.365,26.089 98.618,25.836 98.976,25.836 99.229,26.089 99.229,26.611 99.318,26.7 99.444,26.7 99.534,26.611 99.534,26.089 99.787,25.836 100.144,25.836 100.397,26.089 100.397,26.611 100.487,26.7 100.613,26.7 100.702,26.611 100.702,26.089 100.955,25.836 101.313,25.836 101.566,26.089 101.566,27.978 101.655,28.067 101.781,28.067 101.87,27.978 101.87,26.089 102.123,25.836 102.481,25.836 102.734,26.089 102.734,28.132 102.823,28.222 102.95,28.222 103.039,28.132 103.039,26.089 103.292,25.836 103.65,25.836 103.902,26.089 103.902,27.026 103.992,27.115 104.118,27.115 104.207,27.026 104.207,26.089 104.46,25.836 104.818,25.836 105.071,26.089 105.071,26.611 105.16,26.7 105.286,26.7 105.376,26.611 105.376,26.089 105.629,25.836 105.986,25.836 106.239,26.089 106.239,26.611 106.329,26.7 106.455,26.7 106.544,26.611 106.544,26.089 106.797,25.836 107.155,25.836 107.408,26.089 107.408,26.611 107.497,26.7 107.623,26.7 107.712,26.611 107.712,26.089 107.965,25.836 108.323,25.836 108.576,26.089 108.576,26.611 108.665,26.7 108.792,26.7 108.881,26.611 108.881,26.089 109.134,25.836 109.288,25.836 109.541,26.089 109.541,26.611 109.631,26.7 109.757,26.7 109.846,26.611 109.846,25.688 110.007,25.527 111.1,25.527 111.303,25.73 111.303,26.543 111.46,26.7 114.889,26.7 115.926,27.737 ; 115.926,27.745 116.849,27.745 117.959,28.854 119.609,28.854 ; 119.821,28.642 119.609,28.854 ; 119.821,28.642 119.609,28.854 ; J1.C16@119.9,27.95 119.9,28.452 ccw(c119.631,28.452) 119.822,28.641 ; 119.953,28.51 ccw(c120.4,28.958) 120.079,28.413 ; J1.C16@120,28.125 120,28.21 ccw(c119.39,28.21) 119.822,28.641 ; J1.C16@120.294,27.864 J1.C16@120.294,27.87 ; J1.C16@120.32,27.838 J1.C16@120.32,27.864 ; J1.C16@120.345,27.87 120.345,27.838 J1.C16@120.32,27.864 ; J1.C16@120.4,28.325 cw(c120.4,28.958) 120.079,28.413 ; J1.C16@120.475,28.3 cw(c120.475,29.053) 120.079,28.413 ; 119.822,28.641 119.943,28.52 ; 119.943,28.52 ccw(c120.475,29.053) 120.079,28.413 ; 119.943,28.52 120.32,28.143 120.32,27.87 J1.C16@120.32,27.864
DQD7+: J1.F15 U19.56 | length 48.9
  Top Layer w0.152: U19.56@87.189,27.993 87.189,27.767 ; U19.56@87.189,28.643 87.189,27.767 ; 101.194,24.912 101.295,24.912 ; 113.712,29.247 cw(c114.202,28.757) 113.758,29.289 cw(c114.202,28.757) 114.202,29.45 J1.F15@114.35,29.45 ; 113.774,29.309 ccw(c113.471,29.613) 113.857,29.426 ccw(c113.471,29.613) 113.898,29.567 ccw(c113.471,29.613) 113.9,29.613 J1.F15@113.9,29.875 ; J1.F15@113.875,29.975 113.875,29.57 cw(c113.815,29.57) 113.857,29.527 ; J1.F15@114.075,29.55 ccw(c114.075,29.414) 113.979,29.51 113.857,29.388 ; J1.F15@114.3,29.97 114.278,29.947 113.857,29.527 ; 87.189,27.767 87.299,27.656 87.299,26.188 88.575,24.912 101.295,24.912 ; 101.295,24.912 101.783,24.912 101.785,24.911 102.264,25.391 102.799,25.391 103.052,25.643 103.052,26.351 103.141,26.44 103.268,26.44 103.357,26.351 103.357,25.178 103.61,24.925 103.968,24.925 104.221,25.178 104.221,27.512 104.31,27.601 104.436,27.601 104.525,27.512 104.525,24.512 104.778,24.259 105.136,24.259 105.389,24.512 105.389,25.912 105.461,25.984 105.664,25.984 105.74,25.908 105.74,25.171 106.248,24.663 108.393,24.663 111.579,27.849 111.579,28.43 111.964,28.815 112.434,28.815 112.624,28.626 112.624,27 112.7,26.924 112.979,26.924 113.063,27.007 113.063,28.594 113.162,28.693 113.857,29.388 ; 113.857,29.388 113.857,29.527
DQD7-: J1.F16 U19.57 | length 48.2
  Top Layer w0.152: U19.57@87.689,27.993 87.689,27.767 ; U19.57@87.689,28.643 87.689,27.767 ; 88.214,25.679 88.24,25.654 ; 105.993,25.986 105.993,25.3 106.324,24.968 108.303,24.968 ; 105.994,25.959 105.994,26.086 105.842,26.238 105.258,26.238 105.11,26.09 105.11,24.628 105.02,24.539 104.894,24.539 104.805,24.628 104.805,27.627 104.552,27.88 104.194,27.88 103.941,27.627 103.941,25.293 103.852,25.204 103.726,25.204 103.636,25.293 103.636,26.467 103.383,26.72 103.026,26.72 102.773,26.467 102.773,25.759 102.683,25.67 102.148,25.67 101.67,25.192 88.702,25.192 88.24,25.654 ; 108.306,24.968 108.303,24.968 ; J1.F16@114.325,28.3 114.473,28.3 ccw(c114.473,28.993) 114.963,28.503 ; J1.F16@114.351,27.889 115.053,28.592 115.053,28.778 ; J1.F16@114.775,27.875 114.775,28.137 cw(c115.204,28.137) 114.881,28.419 cw(c115.204,28.137) 114.901,28.441 ; 115.053,28.693 115.053,28.778 ; 87.689,27.767 87.579,27.656 87.579,26.315 88.24,25.654 ; 108.303,24.968 111.299,27.965 111.299,28.546 111.848,29.095 112.559,29.095 113.053,29.589 113.053,29.788 113.988,30.723 114.612,30.723 115.053,30.282 115.053,28.778
EN_PSU: R44.2 U5.11 U6.11 U7.9 | length 78.5
  Top Layer w0.152: v1@30.281,81.525 U6.11@30.412,80.813 ; v1@30.284,81.503 U6.11@30.51,80.7 ; v1@30.284,81.499 U6.11@30.51,80.805 ; v1@30.291,81.473 U6.11@30.608,80.813 ; U6.11@30.51,80.455 30.51,81.534 v1(30.48,81.534) ; v1@30.673,81.488 U6.11@30.412,80.813 ; v1@30.678,81.515 U6.11@30.51,80.805 ; v1@30.678,81.517 U6.11@30.51,80.7 ; v1@30.679,81.542 U6.11@30.608,80.813 ; U7.9@56.198,76.723 56.198,76.822 56.926,76.822 ; U7.9@56.535,76.821 56.926,76.822 ; U7.9@56.548,76.723 56.926,76.822 ; U7.9@56.585,76.631 56.926,76.822 ; v1@57.896,77.862 57.637,77.449 ; v1(58.039,77.724) 57.637,77.449 ; v1@58.115,77.54 57.637,77.449 ; U5.11@72.863,71.92 72.961,72.544 U5.11@73.059,71.92 ; U5.11@72.961,71.912 v1@72.961,73.05 ; U6.11@30.412,80.813 v1@30.51,81.437 ; U6.11@30.412,80.813 v1(30.48,81.534) ; v1(30.48,81.534) U6.11@30.51,80.7 ; v1(30.48,81.534) U6.11@30.608,80.813 ; v1(30.48,81.534) U6.11@30.51,80.805 ; U6.11@30.51,80.805 v1@30.51,81.437 ; v1@30.51,81.437 U6.11@30.608,80.813 ; 56.926,76.822 57.554,77.449 57.637,77.449
  Bottom Layer w0.152: v1@30.354,81.38 31.18,80.834 v1@30.634,81.66 ; v1(30.48,81.534) 32.512,79.502 44.501,79.502 45.784,78.219 54.724,78.219 55.372,78.867 56.896,78.867 v1(58.039,77.724) ; v1@57.885,77.598 57.339,78.424 ; v1@58.075,77.529 58.584,77.724 ; v1@58.075,77.919 58.584,77.724 ; v1@58.165,77.878 57.339,78.424 ; R44.2@62.063,78.025 62.357,77.521 ; R44.2@62.206,78.085 62.357,77.521 ; R44.2@62.302,77.907 61.519,78.207 ; R44.2@62.302,78.506 61.519,78.207 ; R44.2@62.343,78.055 61.519,78.207 ; R44.2@62.343,78.358 61.519,78.207 ; R44.2@62.357,78.105 62.357,77.521 ; R44.2@62.508,78.085 62.357,77.521 ; R44.2@62.651,78.025 62.357,77.521 ; 69.025,75.425 71.4,73.05 v1(72.95,73.05) ; 69.025,75.438 64.44,75.438 62.357,77.521 ; 57.339,78.424 v1(58.039,77.724) ; v1(58.039,77.724) 58.584,77.724 ; 58.584,77.724 59.066,78.207 R44.2@62.357,78.207 62.357,77.521